# Altium PCB Control_Board.PcbDoc (part 1 of 2)
Units mm, origin at the board's own origin, x right, y up, seen from the top; angles counter-clockwise.
Board outline 340 x 220 mm, 2 copper layers (Top Layer, Bottom Layer); 101 components, 44 nets, 469 pads, 64 vias.
Unrouted connection lines stored in the file: 274.
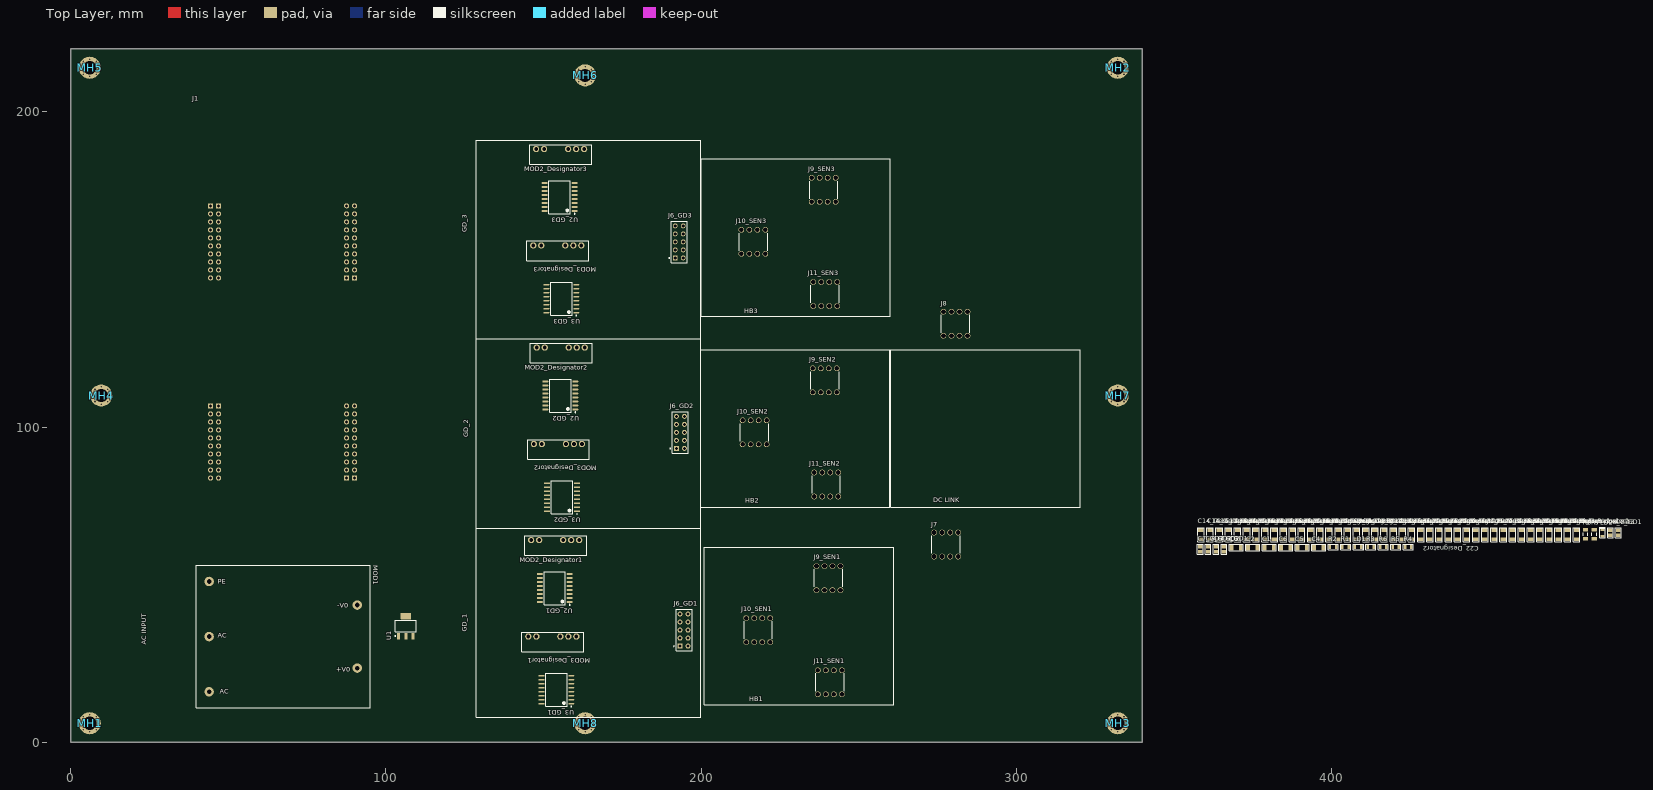
[diagram p0: Top Layer view]
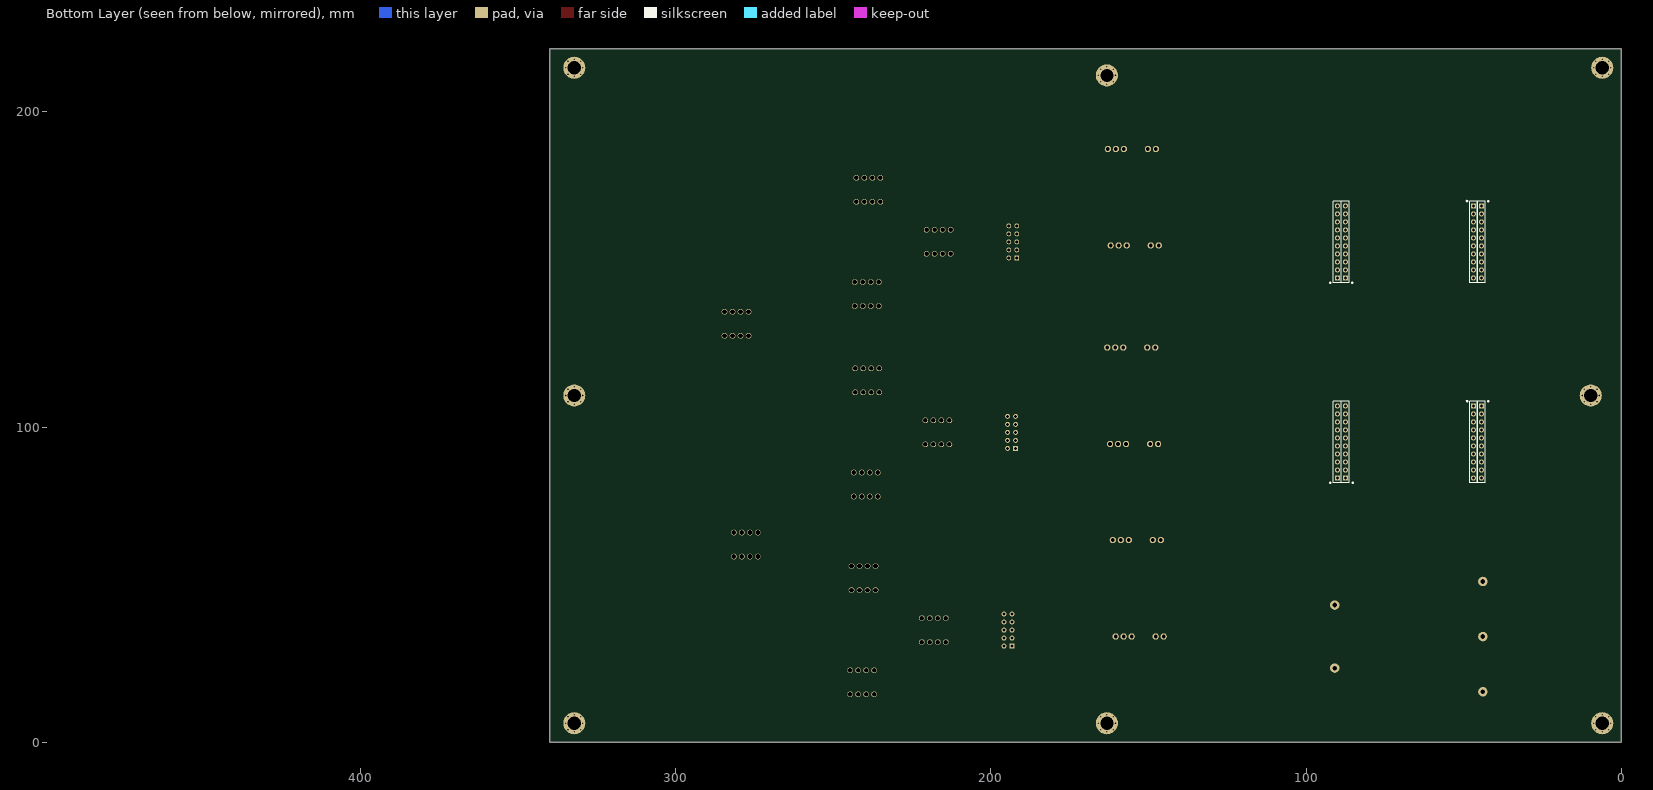
[diagram p1: Bottom Layer view, seen from below]

## Layer stack, top to bottom
Top Solder: solder mask 0.0102, Solder Resist, Dk 3.5
Top Layer: signal copper 0.0356
Dielectric 1: dielectric 0.32, FR-4, Dk 4.8
Bottom Layer: signal copper 0.0356
Bottom Solder: solder mask 0.0102, Solder Resist, Dk 3.5

## Board outline
0,0 0,220 340,220 340,0

## Design rules (kind name [scope] priority, off if disabled: settings)
Clearance [All] p1: gap=0.254 ignorepadtopadclearanceinfootprint=FALSE
PolygonConnect [All] p1: connectstyle=Relief reliefconductorwidth=0.254 reliefentries=4 polygonreliefangle="90 Angle" airgapwidth=0.254
RoutingVias [All] p1: holewidth=0.711 width=1.27 viastyle="Through Hole" minholewidth=0.711 minwidth=1.27 maxholewidth=0.711 maxwidth=1.27
SolderMaskExpansion [All] p1: expansion=0.102 istentingtop=FALSE
SupplyNets "Schematic Supply Nets_4" [InNet('HV_GND_SEN1')] p1: voltage=0.000
SupplyNets "Schematic Supply Nets_3" [InNet('HV_PWR_SEN1')] p2: voltage=0.000
SupplyNets "Schematic Supply Nets_6" [InNet('VEE_LS_GD_HB_GD1')] p3: voltage=0.000
SupplyNets "Schematic Supply Nets_2" [InNet('+5V')] p4: voltage=0.000
SupplyNets "Schematic Supply Nets_1" [InNet('+3V3')] p5: voltage=0.000
SupplyNets "Schematic Supply Nets" [InNet('GND')] p6: voltage=0.000
Width [All] p1: maxlimit=0.254 minlimit=0.254 preferedwidth=0.254
30 further rules are at their usual default settings.

## Classes and differential pairs
channel class HB_SENSING: SEN1 SEN2 SEN3
component class SEN3: J9_SEN3 J10_SEN3 J11_SEN3
component class SEN2: J9_SEN2 J10_SEN2 J11_SEN2
component class SEN1: J9_SEN1 J10_SEN1 J11_SEN1
component class Control_Board_SCH: J7 J8
channel class Gate_Driver_Supply: Designator1 Designator2 Designator3
channel class Gate_Driver: GD1 GD2 GD3
net class GD_LS_TEMP[1..3]: GD_LS_TEMP1 GD_LS_TEMP2 GD_LS_TEMP3
net class GD_LS_PWM[1..3]: GD_LS_PWM1 GD_LS_PWM2 GD_LS_PWM3
net class GD_HS_TEMP[1..3]: GD_HS_TEMP1 GD_HS_TEMP2 GD_HS_TEMP3
net class GD_HS_PWM[1..3]: GD_HS_PWM1 GD_HS_PWM2 GD_HS_PWM3
net class GD_EN[1..3]: GD_EN1 GD_EN2 GD_EN3
net class GD_\F\L\T\[1..3]: GD_\F\L\T\1 GD_\F\L\T\2 GD_\F\L\T\3
component class GD3: C7_GD3 C8_GD3 J6_GD3 U2_GD3 U3_GD3
component class GD2: C7_GD2 C8_GD2 J6_GD2 U2_GD2 U3_GD2
component class GD1: C7_GD1 C8_GD1 J6_GD1 U2_GD1 U3_GD1
component class Designator: J1 R1 R2 R3 R4 R5 R6
component class Designator3: C9_Designator3 C10_Designator3 C11_Designator3 C12_Designator3 C13_Designator3 C14_Designator3 C15_Designator3 C16_Designator3 C17_Designator3 C18_Designator3 C19_Designator3 C20_Designator3 C21_Designator3 C22_Designator3 MOD2_Designator3 MOD3_Designator3
component class Designator2: C9_Designator2 C10_Designator2 C11_Designator2 C12_Designator2 C13_Designator2 C14_Designator2 C15_Designator2 C16_Designator2 C17_Designator2 C18_Designator2 C19_Designator2 C20_Designator2 C21_Designator2 C22_Designator2 MOD2_Designator2 MOD3_Designator2
component class Designator1: C9_Designator1 C10_Designator1 C11_Designator1 C12_Designator1 C13_Designator1 C14_Designator1 C15_Designator1 C16_Designator1 C17_Designator1 C18_Designator1 C19_Designator1 C20_Designator1 C21_Designator1 C22_Designator1 MOD2_Designator1 MOD3_Designator1

## Components (designator, comment, footprint, x,y, rotation, side; value= is the part's Value field where it differs from the comment)
C1 "10uF 10% 50V X7R 1206" CAPC3216X18N 380.251,61.766 r0 top value=10µF
C2 "10uF 10% 50V X7R 1206" CAPC3216X18N 375.018,61.766 r0 top value=10µF
C3 "10uF 10% 50V X7R 1206" CAPC3216X18N 369.785,61.766 r0 top value=10µF
C4 "10uF 10% 50V X7R 1206" CAPC3216X18N 395.95,61.766 r0 top value=10µF
C5 "10uF 10% 50V X7R 1206" CAPC3216X18N 390.717,61.766 r0 top value=10µF
C6 "10uF 10% 50V X7R 1206" CAPC3216X18N 385.484,61.766 r0 top value=10µF
C7_GD1 "1uF 10% 50V X7R 0805" CAPC2012X10N 491.046,66.449 r90 top value=1µF (schematic designator C7)
C7_GD2 "1uF 10% 50V X7R 0805" CAPC2012X10N 360.886,61.216 r90 top value=1µF (schematic designator C7)
C7_GD3 "1uF 10% 50V X7R 0805" CAPC2012X10N 358.378,61.216 r90 top value=1µF (schematic designator C7)
C8_GD1 "1uF 10% 50V X7R 0805" CAPC2012X10N 365.902,61.216 r90 top value=1µF (schematic designator C8)
C8_GD2 "1uF 10% 50V X7R 0805" CAPC2012X10N 363.394,61.216 r90 top value=1µF (schematic designator C8)
C8_GD3 "1uF 10% 50V X7R 0805" CAPC2012X10N 488.538,66.449 r90 top value=1µF (schematic designator C8)
C9_Designator1 "1uF 10% 50V X7R 1206" CAPC3216X18N 405.106,65.849 r90 top value=1µF (schematic designator C9)
C9_Designator2 "1uF 10% 50V X7R 1206" CAPC3216X18N 408.014,65.849 r90 top value=1µF (schematic designator C9)
C9_Designator3 "1uF 10% 50V X7R 1206" CAPC3216X18N 410.922,65.849 r90 top value=1µF (schematic designator C9)
C10_Designator1 "10uF 10% 50V X7R 1206" CAPC3216X18N 396.382,65.849 r90 top value=10µF (schematic designator C10)
C10_Designator2 "10uF 10% 50V X7R 1206" CAPC3216X18N 399.29,65.849 r90 top value=10µF (schematic designator C10)
C10_Designator3 "10uF 10% 50V X7R 1206" CAPC3216X18N 402.198,65.849 r90 top value=10µF (schematic designator C10)
C11_Designator1 "10uF 10% 100V X6S 1206" CAPC3216X18N 413.83,65.849 r90 top value=10µF (schematic designator C11)
C11_Designator2 "10uF 10% 100V X6S 1206" CAPC3216X18N 425.462,65.849 r90 top value=10µF (schematic designator C11)
C11_Designator3 "10uF 10% 100V X6S 1206" CAPC3216X18N 428.37,65.849 r90 top value=10µF (schematic designator C11)
C12_Designator1 "1uF 10% 50V X7R 1206" CAPC3216X18N 431.278,65.849 r90 top value=1µF (schematic designator C12)
C12_Designator2 "1uF 10% 50V X7R 1206" CAPC3216X18N 416.738,65.849 r90 top value=1µF (schematic designator C12)
C12_Designator3 "1uF 10% 50V X7R 1206" CAPC3216X18N 419.646,65.849 r90 top value=1µF (schematic designator C12)
C13_Designator1 "1uF 10% 50V X7R 1206" CAPC3216X18N 422.554,65.849 r90 top value=1µF (schematic designator C13)
C13_Designator2 "1uF 10% 50V X7R 1206" CAPC3216X18N 367.302,65.849 r90 top value=1µF (schematic designator C13)
C13_Designator3 "1uF 10% 50V X7R 1206" CAPC3216X18N 370.21,65.849 r90 top value=1µF (schematic designator C13)
C14_Designator1 "1uF 10% 50V X7R 1206" CAPC3216X18N 373.118,65.849 r90 top value=1µF (schematic designator C14)
C14_Designator2 "1uF 10% 50V X7R 1206" CAPC3216X18N 358.578,65.849 r90 top value=1µF (schematic designator C14)
C14_Designator3 "1uF 10% 50V X7R 1206" CAPC3216X18N 361.486,65.849 r90 top value=1µF (schematic designator C14)
C15_Designator1 "10uF 10% 50V X7R 1206" CAPC3216X18N 364.394,65.849 r90 top value=10µF (schematic designator C15)
C15_Designator2 "10uF 10% 50V X7R 1206" CAPC3216X18N 376.026,65.849 r90 top value=10µF (schematic designator C15)
C15_Designator3 "10uF 10% 50V X7R 1206" CAPC3216X18N 387.658,65.849 r90 top value=10µF (schematic designator C15)
C16_Designator1 "1uF 10% 50V X7R 1206" CAPC3216X18N 390.566,65.849 r90 top value=1µF (schematic designator C16)
C16_Designator2 "1uF 10% 50V X7R 1206" CAPC3216X18N 393.474,65.849 r90 top value=1µF (schematic designator C16)
C16_Designator3 "1uF 10% 50V X7R 1206" CAPC3216X18N 378.934,65.849 r90 top value=1µF (schematic designator C16)
C17_Designator1 "10uF 10% 50V X7R 1206" CAPC3216X18N 381.842,65.849 r90 top value=10µF (schematic designator C17)
C17_Designator2 "10uF 10% 50V X7R 1206" CAPC3216X18N 384.75,65.849 r90 top value=10µF (schematic designator C17)
C17_Designator3 "10uF 10% 50V X7R 1206" CAPC3216X18N 463.266,65.849 r90 top value=10µF (schematic designator C17)
C18_Designator1 "10uF 10% 100V X6S 1206" CAPC3216X18N 466.174,65.849 r90 top value=10µF (schematic designator C18)
C18_Designator2 "10uF 10% 100V X6S 1206" CAPC3216X18N 457.45,65.849 r90 top value=10µF (schematic designator C18)
C18_Designator3 "10uF 10% 100V X6S 1206" CAPC3216X18N 460.358,65.849 r90 top value=10µF (schematic designator C18)
C19_Designator1 "1uF 10% 50V X7R 1206" CAPC3216X18N 474.898,65.849 r90 top value=1µF (schematic designator C19)
C19_Designator2 "1uF 10% 50V X7R 1206" CAPC3216X18N 477.806,65.849 r90 top value=1µF (schematic designator C19)
C19_Designator3 "1uF 10% 50V X7R 1206" CAPC3216X18N 469.082,65.849 r90 top value=1µF (schematic designator C19)
C20_Designator1 "1uF 10% 50V X7R 1206" CAPC3216X18N 471.99,65.849 r90 top value=1µF (schematic designator C20)
C20_Designator2 "1uF 10% 50V X7R 1206" CAPC3216X18N 440.002,65.849 r90 top value=1µF (schematic designator C20)
C20_Designator3 "1uF 10% 50V X7R 1206" CAPC3216X18N 442.91,65.849 r90 top value=1µF (schematic designator C20)
C21_Designator1 "1uF 10% 50V X7R 1206" CAPC3216X18N 434.186,65.849 r90 top value=1µF (schematic designator C21)
C21_Designator2 "1uF 10% 50V X7R 1206" CAPC3216X18N 437.094,65.849 r90 top value=1µF (schematic designator C21)
C21_Designator3 "1uF 10% 50V X7R 1206" CAPC3216X18N 451.634,65.849 r90 top value=1µF (schematic designator C21)
C22_Designator1 "10uF 10% 50V X7R 1206" CAPC3216X18N 454.542,65.849 r90 top value=10µF (schematic designator C22)
C22_Designator2 "10uF 10% 50V X7R 1206" CAPC3216X18N 445.818,65.824 r270 top value=10µF (schematic designator C22)
C22_Designator3 "10uF 10% 50V X7R 1206" CAPC3216X18N 448.726,65.849 r90 top value=10µF (schematic designator C22)
J1 "CON80: LAUNCHXL-F28379D" LAUNCHXL-F28379D 44.323,170.18 r0 top
J6_GD1 "CON10: PPTC052LFBN-RC" SLIN-PPTC052LFBN-RC_V 194.564,35.56 r90 top (schematic designator J6)
J6_GD2 "CON10: PPTC052LFBN-RC" SLIN-PPTC052LFBN-RC_V 193.421,98.298 r90 top (schematic designator J6)
J6_GD3 "CON10: PPTC052LFBN-RC" SLIN-PPTC052LFBN-RC_V 193.04,158.75 r90 top (schematic designator J6)
J7 "CON1: 7460307" "7460307_chemical surface" 277.723,62.707 r0 top
J8 "CON1: 7460307" "7460307_chemical surface" 280.695,132.781 r0 top
J9_SEN1 "CON1: 7460307" "7460307_chemical surface" 240.411,52.07 r0 top (schematic designator J9)
J9_SEN2 "CON1: 7460307" "7460307_chemical surface" 239.268,114.808 r0 top (schematic designator J9)
J9_SEN3 "CON1: 7460307" "7460307_chemical surface" 238.887,175.26 r0 top (schematic designator J9)
J10_SEN1 "CON1: 7460307" "7460307_chemical surface" 218.105,35.56 r0 top (schematic designator J10)
J10_SEN2 "CON1: 7460307" "7460307_chemical surface" 216.962,98.298 r0 top (schematic designator J10)
J10_SEN3 "CON1: 7460307" "7460307_chemical surface" 216.581,158.75 r0 top (schematic designator J10)
J11_SEN1 "CON1: 7460307" "7460307_chemical surface" 240.865,19.012 r0 top (schematic designator J11)
J11_SEN2 "CON1: 7460307" "7460307_chemical surface" 239.722,81.75 r0 top (schematic designator J11)
J11_SEN3 "CON1: 7460307" "7460307_chemical surface" 239.341,142.202 r0 top (schematic designator J11)
LD1 "RED 2mA 0803" LED_HSMH-H150 408.449,61.966 r0 top
LD2 "RED 2mA 0803" LED_HSMH-H150 486.03,66.371 r90 top
MH1 "Mounting_Hole_M4" Mounting_Hole_M4 6,6 r0 top
MH2 "Mounting_Hole_M4" Mounting_Hole_M4 332.189,214 r0 top
MH3 "Mounting_Hole_M4" Mounting_Hole_M4 332.189,6 r0 top
MH4 "Mounting_Hole_M4" Mounting_Hole_M4 9.652,110 r0 top
MH5 "Mounting_Hole_M4" Mounting_Hole_M4 6,214 r0 top
MH6 "Mounting_Hole_M4" Mounting_Hole_M4 163.189,211.582 r0 top
MH7 "Mounting_Hole_M4" Mounting_Hole_M4 332.189,110 r0 top
MH8 "Mounting_Hole_M4" Mounting_Hole_M4 163.189,6 r0 top
MOD1 "MOD: TMS10105" "MOD: TMS10105-Footprint-1" 43.885,50.998 r0 top
MOD2_Designator1 "MOD: NMV0515SC" "MOD: NMV0515SC" 146.05,64.135 r0 top (schematic designator MOD2)
MOD2_Designator2 "MOD: NMV0515SC" "MOD: NMV0515SC" 147.828,125.222 r0 top (schematic designator MOD2)
MOD2_Designator3 "MOD: NMV0515SC" "MOD: NMV0515SC" 147.625,188.214 r0 top (schematic designator MOD2)
MOD3_Designator1 "MOD: NMV0515SC" "MOD: NMV0515SC" 145.161,33.528 r0 top (schematic designator MOD3)
MOD3_Designator2 "MOD: NMV0515SC" "MOD: NMV0515SC" 146.939,94.615 r0 top (schematic designator MOD3)
MOD3_Designator3 "MOD: NMV0515SC" "MOD: NMV0515SC" 146.736,157.607 r0 top (schematic designator MOD3)
R1 "10K 1% 1/4W 0805" RESC2012X05N 404.491,61.966 r0 top value=10k
R2 "10K 1% 1/4W 0805" RESC2012X05N 400.533,61.966 r0 top value=10k
R3 "10K 1% 1/4W 0805" RESC2012X05N 412.51,61.966 r0 top value=10k
R4 "100R 1% 1/8W 0805" RESC2012X05N 424.384,61.966 r0 top value=100
R5 "100R 1% 1/8W 0805" RESC2012X05N 420.426,61.966 r0 top value=100
R6 "100R 1% 1/8W 0805" RESC2012X05N 416.468,61.966 r0 top value=100
R7 "10K 1% 1/4W 1206" RESC3116X06N 483.397,65.974 r90 top value=10k
R8 "10K 1% 1/4W 1206" RESC3116X06N 480.639,65.974 r90 top value=10k
U1 "IC: LM1117MP-3.3/NOPB" DCY0004A_M 106.299,36.83 r90 top
U2_GD1 "IC: UCC21710QDWRQ1" SOIC127P1030X265-16N 153.543,48.895 r180 top (schematic designator U2)
U2_GD2 "IC: UCC21710QDWRQ1" SOIC127P1030X265-16N 155.321,109.982 r180 top (schematic designator U2)
U2_GD3 "IC: UCC21710QDWRQ1" SOIC127P1030X265-16N 155.118,172.974 r180 top (schematic designator U2)
U3_GD1 "IC: UCC21710QDWRQ1" SOIC127P1030X265-16N 154.051,16.637 r180 top (schematic designator U3)
U3_GD2 "IC: UCC21710QDWRQ1" SOIC127P1030X265-16N 155.829,77.724 r180 top (schematic designator U3)
U3_GD3 "IC: UCC21710QDWRQ1" SOIC127P1030X265-16N 155.626,140.716 r180 top (schematic designator U3)

## Footprints (in the part's own frame and the unit in brackets; to place one, negate y for a bottom-side part, rotate by r counter-clockwise, add the part's x,y. Pads: shape width x height; smd on the part's side, far side on the other; paste and mask are expansions set on the pad)
"7460307_chemical surface" [mm] "WP-BUTR Bushes with two Rows Pin-Plate, M4, blind thr 6mm"
  round 1.8 hole 1.475: 1(-3.81,-3.81) 1(-3.81,3.81) 1(-1.27,-3.81) 1(-1.27,3.81) 1(1.27,-3.81) 1(1.27,3.81) 1(3.81,-3.81) 1(3.81,3.81)
  silkscreen extent -4.5,-2.8 4.5,2.8, body extent -4.5,-4.5 4.5,4.5, height 7
CAPC2012X10N [mm]
  rect 1.135x1.42 smd: 1(-0.857,0) 2(0.857,0)
  silkscreen extent -1.6,-0.89 1.6,0.9, body extent -1.05,-0.65 1.05,0.65, height 0.95
CAPC3216X18N [mm]
  rect 1.15x1.75 smd: 1(-1.475,0) 2(1.475,0)
  silkscreen extent -2.22,-1.05 2.24,1.05, body extent -1.65,-0.85 1.65,0.85, height 1.8
DCY0004A_M [mm] "SOT223, 4-Leads, Body 6.7x3.7mm, Pitch 2.3mm, IPC Low Density"
  rrect10% 2.05x1 smd: 1(-3.175,2.3) 2(-3.175,0) 3(-3.175,-2.3)
  rrect5% 2.05x3.25 smd: 4(3.175,0)
  silkscreen extent -3.3,-3.35 1.85,3.47, body extent -3.5,-3.25 3.5,3.25, height 1.62
LAUNCHXL-F28379D [mm]
  rect 1.62x1.62 hole 1.02 mask+0.1: 1(0,0) 11(45.72,-22.86) 21(2.54,0) 31(43.18,-22.86) 41(0,-63.5) 51(45.72,-86.36) 61(2.54,-63.5) 71(43.18,-86.36)
  round 1.62 hole 1.02 mask+0.1: 2(0,-2.54) 3(0,-5.08) 4(0,-7.62) 5(0,-10.16) 6(0,-12.7) 7(0,-15.24) 8(0,-17.78) 9(0,-20.32) 10(0,-22.86) 12(45.72,-20.32) 13(45.72,-17.78) 14(45.72,-15.24) 15(45.72,-12.7) 16(45.72,-10.16) 17(45.72,-7.62) 18(45.72,-5.08) 19(45.72,-2.54) 20(45.72,0) 22(2.54,-2.54) 23(2.54,-5.08) 24(2.54,-7.62) 25(2.54,-10.16) 26(2.54,-12.7) 27(2.54,-15.24) 28(2.54,-17.78) 29(2.54,-20.32) 30(2.54,-22.86) 32(43.18,-20.32) 33(43.18,-17.78) 34(43.18,-15.24) 35(43.18,-12.7) 36(43.18,-10.16) 37(43.18,-7.62) 38(43.18,-5.08) 39(43.18,-2.54) 40(43.18,0) 42(0,-66.04) 43(0,-68.58) 44(0,-71.12) 45(0,-73.66) 46(0,-76.2) 47(0,-78.74) 48(0,-81.28) 49(0,-83.82) 50(0,-86.36) 52(45.72,-83.82) 53(45.72,-81.28) 54(45.72,-78.74) 55(45.72,-76.2) 56(45.72,-73.66) 57(45.72,-71.12) 58(45.72,-68.58) 59(45.72,-66.04) 60(45.72,-63.5) 62(2.54,-66.04) 63(2.54,-68.58) 64(2.54,-71.12) 65(2.54,-73.66) 66(2.54,-76.2) 67(2.54,-78.74) 68(2.54,-81.28) 69(2.54,-83.82) 70(2.54,-86.36) 72(43.18,-83.82) 73(43.18,-81.28) 74(43.18,-78.74) 75(43.18,-76.2) 76(43.18,-73.66) 77(43.18,-71.12) 78(43.18,-68.58) 79(43.18,-66.04) 80(43.18,-63.5)
  body extent -6.1,-98.19 52.32,32.66, height 16.62
LED_HSMH-H150 [mm]
  rect 0.8x1.35 smd: 1(-1,0) 2(1,0)
  silkscreen extent -1.58,-0.85 1.78,0.85, body extent -1.08,-0.6 0.92,0.65, height 1.11
"MOD: NMV0515SC" [mm]
  round 2 hole 1.15: 1(0,0) 2(2.54,0) 5(10.16,0) 6(12.7,0) 7(15.24,0)
  silkscreen extent -2.01,-4.78 17.63,1.42, body extent -1.91,-4.83 17.59,1.19, height 10.01
"MOD: TMS10105-Footprint-1" [mm]
  round 3 hole 1.5: 1(47,-7.5) 3(47,-27.5) 4(0,-35) 5(0,-17.5) 6(0,0)
  silkscreen extent -4.06,-40.13 51.18,5.21, body extent -3.95,-40.03 51.05,4.97, height 24.01
Mounting_Hole_M4 [mm]
  round 7 hole 4.2: 1(0,0)
RESC2012X05N [mm]
  rect 0.8x1.35 smd: 1(-1,0) 2(1,0)
  silkscreen extent -1.58,-0.85 1.58,0.85, body extent -1.05,-0.67 1.05,0.67, height 0.5
RESC3116X06N [mm]
  rect 1.1x1.7 smd: 1(-1.4,0) 2(1.4,0)
  silkscreen extent -0.45,-0.75 0.45,0.75, body extent -1.6,-0.85 1.6,0.85, height 0.65
SLIN-PPTC052LFBN-RC_V [mm] "THD, 10-Leads, Body 13.2x5.08mm, Pitch 2.54mm"
  rect 1.55x1.55 hole 1.02: 1(-5.08,1.27)
  round 1.55 hole 1.02: 2(-2.54,1.27) 3(0,1.27) 4(2.54,1.27) 5(5.08,1.27) 6(-5.08,-1.27) 7(-2.54,-1.27) 8(0,-1.27) 9(2.54,-1.27) 10(5.08,-1.27)
  silkscreen extent -6.6,-2.54 6.6,3.32, body extent -6.6,-2.54 6.6,2.54, height 8.5
SOIC127P1030X265-16N [mm] "SOIC, 16-Leads, Body 10,30x7,50mm, Pitch 1,27mm, IPC Medium Density"
  oval 1.9x0.6 smd: 1(-4.75,4.445) 2(-4.75,3.175) 3(-4.75,1.905) 4(-4.75,0.635) 5(-4.75,-0.635) 6(-4.75,-1.905) 7(-4.75,-3.175) 8(-4.75,-4.445) 9(4.75,-4.445) 10(4.75,-3.175) 11(4.75,-1.905) 12(4.75,-0.635) 13(4.75,0.635) 14(4.75,1.905) 15(4.75,3.175) 16(4.75,4.445)
  silkscreen extent -4.88,-5.25 3.4,5.42, body extent -5.17,-5.15 5.17,5.15, height 2.59

## Part data
C1 C2 C3 C4 C5 C6 C10_Designator1 C10_Designator2 C10_Designator3 C15_Designator1 C15_Designator2 C15_Designator3 C17_Designator1 C17_Designator2 C17_Designator3 C22_Designator1 C22_Designator2 C22_Designator3: library part CMP-001-00049-1, "Ceramic Capacitor, Multilayer, Ceramic, 50V, 10% +Tol, 10% -Tol, X7R, 15% TC, 10uF, Surface Mount, 1206", Case Code (Metric)=3216, Case/Package=1206, Dielectric=X7R, Dielectric Material=Ceramic, Manufacturer=TDK, Manufacturer Lifecycle Status=PRODUCTION, Manufacturer Part Number=C3216X7R1H106K160AC, Max Operating Temperature=125°C, Min Operating Temperature=-55°C, Voltage Rating=50V, Category="Ceramic Capacitors", China RoHS=Compliant, ComponentLink1Description=https://datasheet.octopart.com:443/C3216X7R1H106K160AC-TDK-datasheet-175423548.pdf?src-supplier=TME, ComponentLink1URL=https://datasheet.octopart.com:443/C3216X7R1H106K160AC-TDK-datasheet-175423548.pdf?src-supplier=TME, ComponentLink2Description=https://datasheet.octopart.com:443/C3216X7R1H106K160AC-TDK-datasheet-182135025.pdf?src-supplier=TME, ComponentLink2URL=https://datasheet.octopart.com:443/C3216X7R1H106K160AC-TDK-datasheet-182135025.pdf?src-supplier=TME, ComponentLink3Description=https://datasheet.octopart.com:443/C3216X7R1H106K160AC-TDK-datasheet-159617022.pdf?src-supplier=TME, ComponentLink3URL=https://datasheet.octopart.com:443/C3216X7R1H106K160AC-TDK-datasheet-159617022.pdf?src-supplier=TME, ComponentLink4Description=https://datasheet.octopart.com:443/C3216X7R1H106K160AC-TDK-datasheet-151546523.pdf?src-supplier=ODG+(Origin+Data+Global), ComponentLink4URL=https://datasheet.octopart.com:443/C3216X7R1H106K160AC-TDK-datasheet-151546523.pdf?src-supplier=ODG+(Origin+Data+Global), ComponentLink5Description=https://datasheet.octopart.com/C3216X7R1H106K160AC-TDK-datasheet-41194876.pdf, ComponentLink5URL=https://datasheet.octopart.com/C3216X7R1H106K160AC-TDK-datasheet-41194876.pdf, Design Item ID="10uF 10% 50V X7R 1206", Export Control Classification Number (ECCN) Code=EAR99, Harmonized Tariff Schedule (HTS) Code=8532.24.00.20, Height=1.6mm, Introduction Date=2018-03-29, Lead Free="Lead Free", Length=3.2mm, Lifecycle Status=Production, Material=Ceramic, Max Length=3.5mm, Max Width=1.9mm, Min Length=3.1mm, Min Width=1.5mm, Mounting Technology="Surface Mount", Number of Terminals=2, Pricing="100=3,09, 250=2,81, 500=2,35, 1000=2,2, 2000=1,97 (DKK)", REACH SVHC=Yes, RoHS=Compliant, Schedule B="8532240020, 8532240020", Source=MasterLibrary_SCH.SchLib, Stock=26276, Thickness=1.6mm, Voltage Rating (DC)=50V, Width=1.6mm
C7_GD1 C7_GD2 C7_GD3 C8_GD1 C8_GD2 C8_GD3: "Ceramic Capacitor, Multilayer, Ceramic, 50V, 10% +Tol, 10% -Tol, X7R, 15% TC, 1uF, Surface Mount, 0805", Case Code (Metric)=2012, Case/Package=0805, Dielectric=X7R, Dielectric Material=Ceramic, Manufacturer=TDK, Manufacturer Lifecycle Status=PRODUCTION, Manufacturer Part Number=C2012X7R1H105K125AB, Max Operating Temperature=125°C, Min Operating Temperature=-55°C, Supplier Part Number=2346944, Voltage Rating=50V, Category="Ceramic Capacitors", China RoHS=Compliant, ComponentLink1Description=https://datasheet.octopart.com:443/C3216X7R1H106K160AC-TDK-datasheet-175423548.pdf?src-supplier=TME, ComponentLink1URL=https://datasheet.octopart.com:443/C3216X7R1H106K160AC-TDK-datasheet-175423548.pdf?src-supplier=TME, ComponentLink2Description=https://datasheet.octopart.com:443/C3216X7R1H106K160AC-TDK-datasheet-182135025.pdf?src-supplier=TME, ComponentLink2URL=https://datasheet.octopart.com:443/C3216X7R1H106K160AC-TDK-datasheet-182135025.pdf?src-supplier=TME, ComponentLink3Description=https://datasheet.octopart.com:443/C3216X7R1H106K160AC-TDK-datasheet-159617022.pdf?src-supplier=TME, ComponentLink3URL=https://datasheet.octopart.com:443/C3216X7R1H106K160AC-TDK-datasheet-159617022.pdf?src-supplier=TME, ComponentLink4Description=https://datasheet.octopart.com:443/C3216X7R1H106K160AC-TDK-datasheet-151546523.pdf?src-supplier=ODG+(Origin+Data+Global), ComponentLink4URL=https://datasheet.octopart.com:443/C3216X7R1H106K160AC-TDK-datasheet-151546523.pdf?src-supplier=ODG+(Origin+Data+Global), ComponentLink5Description=https://datasheet.octopart.com/C3216X7R1H106K160AC-TDK-datasheet-41194876.pdf, ComponentLink5URL=https://datasheet.octopart.com/C3216X7R1H106K160AC-TDK-datasheet-41194876.pdf, Export Control Classification Number (ECCN) Code=EAR99, Harmonized Tariff Schedule (HTS) Code=8532.24.00.20, Height=1.6mm, Introduction Date=2018-03-29, Lead Free="Lead Free", Length=3.2mm, Lifecycle Status=Production, Material=Ceramic, Max Length=3.5mm, Max Width=1.9mm, Min Length=3.1mm, Min Width=1.5mm, Mounting Technology="Surface Mount", Number of Terminals=2, Pricing="100=3,09, 250=2,81, 500=2,35, 1000=2,2, 2000=1,97 (DKK)", REACH SVHC=Yes, RoHS=Compliant, Stock=26276, Supplier=Farnell, Thickness=1.6mm, Voltage Rating (DC)=50V, Width=1.6mm
C9_Designator1 C9_Designator2 C9_Designator3 C12_Designator1 C12_Designator2 C12_Designator3 C13_Designator1 C13_Designator2 C13_Designator3 C14_Designator1 C14_Designator2 C14_Designator3 C16_Designator1 C16_Designator2 C16_Designator3 C19_Designator1 C19_Designator2 C19_Designator3 C20_Designator1 C20_Designator2 C20_Designator3 C21_Designator1 C21_Designator2 C21_Designator3: library part CMP-001-00048-1, "Ceramic Capacitor, Multilayer, Ceramic, 50V, 10% +Tol, 10% -Tol, X7R, 15% TC, 1uF, Surface Mount, 1206", Case Code (Metric)=3216, Case/Package=1206, Dielectric=X7R, Dielectric Material=Ceramic, Manufacturer=TDK, Manufacturer Lifecycle Status=PRODUCTION, Manufacturer Part Number=C3216X7R1H105K160AB, Max Operating Temperature=125°C, Min Operating Temperature=-55°C, Voltage Rating=50V, Category="Ceramic Capacitors", China RoHS=Compliant, ComponentLink1Description=https://datasheet.octopart.com:443/C3216X7R1H106K160AC-TDK-datasheet-175423548.pdf?src-supplier=TME, ComponentLink1URL=https://datasheet.octopart.com:443/C3216X7R1H106K160AC-TDK-datasheet-175423548.pdf?src-supplier=TME, ComponentLink2Description=https://datasheet.octopart.com:443/C3216X7R1H106K160AC-TDK-datasheet-182135025.pdf?src-supplier=TME, ComponentLink2URL=https://datasheet.octopart.com:443/C3216X7R1H106K160AC-TDK-datasheet-182135025.pdf?src-supplier=TME, ComponentLink3Description=https://datasheet.octopart.com:443/C3216X7R1H106K160AC-TDK-datasheet-159617022.pdf?src-supplier=TME, ComponentLink3URL=https://datasheet.octopart.com:443/C3216X7R1H106K160AC-TDK-datasheet-159617022.pdf?src-supplier=TME, ComponentLink4Description=https://datasheet.octopart.com:443/C3216X7R1H106K160AC-TDK-datasheet-151546523.pdf?src-supplier=ODG+(Origin+Data+Global), ComponentLink4URL=https://datasheet.octopart.com:443/C3216X7R1H106K160AC-TDK-datasheet-151546523.pdf?src-supplier=ODG+(Origin+Data+Global), ComponentLink5Description=https://datasheet.octopart.com/C3216X7R1H106K160AC-TDK-datasheet-41194876.pdf, ComponentLink5URL=https://datasheet.octopart.com/C3216X7R1H106K160AC-TDK-datasheet-41194876.pdf, Design Item ID="1uF 10% 50V X7R 1206", Export Control Classification Number (ECCN) Code=EAR99, Harmonized Tariff Schedule (HTS) Code=8532.24.00.20, Height=1.6mm, Introduction Date=2018-03-29, Lead Free="Lead Free", Length=3.2mm, Lifecycle Status=Production, Material=Ceramic, Max Length=3.5mm, Max Width=1.9mm, Min Length=3.1mm, Min Width=1.5mm, Mounting Technology="Surface Mount", Number of Terminals=2, Pricing="100=3,09, 250=2,81, 500=2,35, 1000=2,2, 2000=1,97 (DKK)", REACH SVHC=Yes, RoHS=Compliant, Source=MasterLibrary_SCH.SchLib, Stock=26276, Thickness=1.6mm, Voltage Rating (DC)=50V, Width=1.6mm
C11_Designator1 C11_Designator2 C11_Designator3 C18_Designator1 C18_Designator2 C18_Designator3: library part CMP-001-00084-1, "Multilayer Ceramic Capacitors MLCC - SMD/SMT 1206 100VDC 10uF 10% X6S", Case/Package=1206, Dielectric Material=Ceramic, Manufacturer=TDK, Manufacturer Lifecycle Status=PRODUCTION, Manufacturer Part Number=C3216X6S2A106K160AC, Max Operating Temperature=105°C, Min Operating Temperature=-55°C, Tolerance=10%, Voltage Rating=100V, Category="Ceramic Capacitors", China RoHS=Compliant, ComponentLink1Description=https://datasheet.octopart.com:443/C3216X6S2A106K160AC-TDK-datasheet-159617022.pdf?src-supplier=IHS, ComponentLink1URL=https://datasheet.octopart.com:443/C3216X6S2A106K160AC-TDK-datasheet-159617022.pdf?src-supplier=IHS, ComponentLink2Description=https://datasheet.octopart.com:443/C3216X6S2A106K160AC-TDK-datasheet-151546522.pdf?src-supplier=TDK, ComponentLink2URL=https://datasheet.octopart.com:443/C3216X6S2A106K160AC-TDK-datasheet-151546522.pdf?src-supplier=TDK, ComponentLink3Description=https://datasheet.octopart.com:443/C3216X6S2A106K160AC-TDK-datasheet-164567071.pdf?src-supplier=Future+Electronics, ComponentLink3URL=https://datasheet.octopart.com:443/C3216X6S2A106K160AC-TDK-datasheet-164567071.pdf?src-supplier=Future+Electronics, ComponentLink4Description=https://datasheet.octopart.com:443/C3216X6S2A106K160AC-TDK-datasheet-154543791.pdf?src-supplier=ODG+(Origin+Data+Global), ComponentLink4URL=https://datasheet.octopart.com:443/C3216X6S2A106K160AC-TDK-datasheet-154543791.pdf?src-supplier=ODG+(Origin+Data+Global), Design Item ID="10uF 10% 100V X6S 1206", Export Control Classification Number (ECCN) Code=EAR99, Harmonized Tariff Schedule (HTS) Code=8532.24.00.20, Height=1.6mm, Introduction Date=2021-05-19, Length=3.2mm, Lifecycle Status=Production, Material=Ceramic, Max Length=3.5mm, Max Width=1.9mm, Min Length=3.1mm, Min Width=1.5mm, Mounting Technology="Surface Mount", Number of Terminals=2, Pricing="100=5.2, 250=4.66, 500=4.09, 1000=3.87, 2000=3.66 (DKK)", REACH SVHC=Yes, RoHS=Compliant, Source=MasterLibrary_SCH.SchLib, Stock=24059, Voltage Rating (DC)=100V, Width=1.6mm
J1: "F28379D LaunchPad™ development kit for C2000™ Delfino™ MCU", Manufacturer="Texas Instruments", Manufacturer Lifecycle Status=ACTIVE, Manufacturer Part Number=LAUNCHXL-F28379D, Supplier Part Number=296-46713-ND, Category="DSPs - Digital Signal Processors", ComponentLink1Description=https://octopart.com:443/opatz8j6/c1?t=_qCjX2Wo53PZarO6BjGz1pzxvZLeCrbbVJACmNqqTvR3TEBVwYoGW-DXq5l11NPCyEyQmG2wH9P15DbxEwR5ZZHsyk33RBSXwUdEtCa7jNxIhSrryjNLEF-Vgre1piZzQz56aD2MK6QuEQpUtDRfErQs-_Fz2k06mrjKwHn2nJAT_YV2HxfigPUyr5srGnEy9lLlrNqGpcCNex5yYxUMkQXiFlqqbITrV8bFvInxDQ88sUGODQNtS64O8hVEwNdGa20kbIjdoqOBoaE1JHzrO901WwG08850-S2bXz9NSqERxo83_Q49v-k_oL6cPW0CHjrP4NMWOrNhAcehFalWX6jDFn3RYJBbH4wBv6PGCMA2lz1wT9CaKpwnDvEQJ5WJVjDawH1R7TR419iNQ7OBATXWz7I&src-supplier=Texas+Instruments, ComponentLink1URL=https://octopart.com:443/opatz8j6/c1?t=_qCjX2Wo53PZarO6BjGz1pzxvZLeCrbbVJACmNqqTvR3TEBVwYoGW-DXq5l11NPCyEyQmG2wH9P15DbxEwR5ZZHsyk33RBSXwUdEtCa7jNxIhSrryjNLEF-Vgre1piZzQz56aD2MK6QuEQpUtDRfErQs-_Fz2k06mrjKwHn2nJAT_YV2HxfigPUyr5srGnEy9lLlrNqGpcCNex5yYxUMkQXiFlqqbITrV8bFvInxDQ88sUGODQNtS64O8hVEwNdGa20kbIjdoqOBoaE1JHzrO901WwG08850-S2bXz9NSqERxo83_Q49v-k_oL6cPW0CHjrP4NMWOrNhAcehFalWX6jDFn3RYJBbH4wBv6PGCMA2lz1wT9CaKpwnDvEQJ5WJVjDawH1R7TR419iNQ7OBATXWz7I&src-supplier=Texas+Instruments, ComponentLink2Description=https://datasheet.octopart.com:443/LAUNCHXL-F28379D-Texas-Instruments-datasheet-152741484.pdf?src-supplier=ODG+(Origin+Data+Global), ComponentLink2URL=https://datasheet.octopart.com:443/LAUNCHXL-F28379D-Texas-Instruments-datasheet-152741484.pdf?src-supplier=ODG+(Origin+Data+Global), ComponentLink3Description=https://datasheet.octopart.com:443/LAUNCHXL-F28379D-Texas-Instruments-datasheet-67294821.pdf?src-supplier=element14+APAC, ComponentLink3URL=https://datasheet.octopart.com:443/LAUNCHXL-F28379D-Texas-Instruments-datasheet-67294821.pdf?src-supplier=element14+APAC, ComponentLink4Description=https://datasheet.octopart.com:443/LAUNCHXL-F28379D-Texas-Instruments-datasheet-103777603.pdf?src-supplier=TME, ComponentLink4URL=https://datasheet.octopart.com:443/LAUNCHXL-F28379D-Texas-Instruments-datasheet-103777603.pdf?src-supplier=TME, ComponentLink5Description=http://sigma.octopart.com:80/reach_statement/Texas-Instruments-company-64.pdf?src-supplier=Compliance+Statements, ComponentLink5URL=http://sigma.octopart.com:80/reach_statement/Texas-Instruments-company-64.pdf?src-supplier=Compliance+Statements, ComponentLink6Description=http://sigma.octopart.com:80/conflict_mineral_statement/Texas-Instruments-company-63.pdf?src-supplier=Compliance+Statements, ComponentLink6URL=http://sigma.octopart.com:80/conflict_mineral_statement/Texas-Instruments-company-63.pdf?src-supplier=Compliance+Statements, ComponentLink7Description=https://octopart.com:443/opatz8j6/c1?t=vmM5mUkauSidLfiIfngj-A2eh6SjcyeYQ_18RxJ-XgRT5PFLOln341s3Da68ti8m6yMC8JyHE5YCQ8oxmljwW8O_iXgryuhhxmjCmpHtdr4VDwYtt48MgbKj-slNB3Nj0mMH04CuEmFmw_fUmAswlWbCu5ZMAg5-39dPO4IMZ0IkEkvJqqV3lhWtLIq7mSnDMHN61-x5vEZotwGXpDkhXVPdiQUwVwsuDPl99fprXnUSUtNA7saaZFRkXjg1cuiRBuIcQzdWjl70NXHJ-qE7RXDui7Y0LCAu6IeHkA&src-supplier=Compliance+Statements, ComponentLink7URL=https://octopart.com:443/opatz8j6/c1?t=vmM5mUkauSidLfiIfngj-A2eh6SjcyeYQ_18RxJ-XgRT5PFLOln341s3Da68ti8m6yMC8JyHE5YCQ8oxmljwW8O_iXgryuhhxmjCmpHtdr4VDwYtt48MgbKj-slNB3Nj0mMH04CuEmFmw_fUmAswlWbCu5ZMAg5-39dPO4IMZ0IkEkvJqqV3lhWtLIq7mSnDMHN61-x5vEZotwGXpDkhXVPdiQUwVwsuDPl99fprXnUSUtNA7saaZFRkXjg1cuiRBuIcQzdWjl70NXHJ-qE7RXDui7Y0LCAu6IeHkA&src-supplier=Compliance+Statements, Core Architecture=C2000, Lifecycle Status=Production, Number of Bits=32, Pins=0, Pricing="1=46.8 (USD)", Quantity=4, REACH SVHC=No, Supplier=DigiKey
J6_GD1 J6_GD2 J6_GD3: library part CMP-002-00579-1, "Female, 10C, Straight, .100\"CC; 3.20mm Tail, No Mt. 100u\" Tin; PBT, Phos Bronze, 105 C", Color=Black, Current Rating=3A, Dielectric Material=Polyester, Manufacturer=Sullins, Manufacturer Part Number=PPTC052LFBN-RC, Max Operating Temperature=105°C, Min Operating Temperature=-40°C, Category="Card Edge Connectors", Connector Type="Header, Socket", Contact Gender=Female, Contact Material=Bronze, Contact Plating=Tin, Height=8.5mm, Housing Material=Plastic, Lead Free="Lead Free", Length=13.2mm, Lifecycle Status=Production, Mount="Through Hole", Number of Pins=10, Number of Positions=10, Number of Rows=2, Packaging=Bulk, Pitch=2.54mm, REACH SVHC=Yes, RoHS=Compliant, Row Spacing=2.54mm, Terminal Pitch=2.54mm
J7 J8 J9_SEN1 J9_SEN2 J9_SEN3 J10_SEN1 J10_SEN2 J10_SEN3 J11_SEN1 J11_SEN2 J11_SEN3: library part CMP-002-00580-1, "Conn Power Tap F 1 POS Press Fit ST Thru-Hole 8 Terminal 1 Port Bulk", Current Rating=160A, Manufacturer="Wurth Elektronik", Manufacturer Part Number=7460307, Max Operating Temperature=150°C, Min Operating Temperature=-55°C, Category=Terminals, Contact Material=Tin, Contact Plating=Tin, Height=7mm, Insulation=Non-Insulated, Length=9mm, Material=Brass, Mount="Through Hole", Mounting Technology="Through Hole", Number of Contacts=1, Number of Pins=8, Number of Rows=2, Packaging=Bulk, Pins=8, RoHS=Compliant, Termination=Press-Fit, Thread Size=M4, Width=9mm
LD1 LD2: library part CMP-00246-1, "Single Color LED, Red, Diffused, 2mm", Color=Red, Forward Current=25mA, Forward Voltage=2.6V, Manufacturer=Avago, Manufacturer Part Number=HSMH-H150, Max Operating Temperature=85°C, Min Operating Temperature=-40°C, Category=LEDs, Harmonized Tariff Schedule (HTS) Code=8541.40.20.00, Height=600µm, Introduction Date=2022-12-08, Lens Style=Diffused, Lifecycle Status=Production, Luminous Intensity=7.2mcd, Mount="Surface Mount", Number of Circuits=1, Number of Terminals=2, Peak Wavelength=660nm, REACH SVHC=Yes, RoHS=Compliant, Shape=Rectangular, Terminal Pitch=2.7mm, Viewing Angle=170°
MH1 MH2 MH3 MH4 MH5 MH6 MH7 MH8: library part CMP-293-000000-1, "Mounting Hole M4", Component Type=Mechanical, Design Item ID=Mounting_Hole_M4, Pin Count=1, Source=Electromechanical.SchLib
MOD1: library part CMP-019-00012-2, "AC-DC Regulated Power Supply Module, 1 Output, 10W, 5V Output Hybrid", Current - Output 1=2A, Manufacturer="Traco Power", Manufacturer Part Number=TMS10105, Max Input Voltage=264V, Max Operating Temperature=60°C, Max Output Power=10W, Max Output Voltage=5.1V, Min Input Voltage=85V, Min Operating Temperature=-25°C, Min Output Voltage=4.9V, Nominal Input Voltage=115V, Nominal Output Voltage=5V, Approvals="CB, CE, EN, IEC, UL, cUL", Category="Power Supply Modules", Depth=45mm, Efficiency=78%, Height - Seated (Max)=24.5mm, Length=55mm, Lifecycle Status=Obsolete, Max Output Current=2A, Number of Circuits=1, Number of Outputs=1, Number of Pins=6, Number of Terminals=6, Output Current=2A, Output Power=10W, Output Voltage=5V
MOD2_Designator1 MOD2_Designator2 MOD2_Designator3 MOD3_Designator1 MOD3_Designator2 MOD3_Designator3: library part CMP-00247-2, "Module DC-DC 5VIN 2-OUT 15V/-15V 0.033A/-0.033A 1W 5-Pin SIP Tube", Case/Package=SIP, Current - Output 1=33mA, Current - Output 2=-33mA, Flammability Rating="UL94 V-0", Isolation Voltage=3kV, Manufacturer="Murata Power Solutions", Manufacturer Part Number=NMV0515SC, Max Operating Temperature=85°C, Max Output Power=1W, Max Supply Voltage=5.5V, Min Input Voltage (DC)=4.5V, Min Operating Temperature=-40°C, Nominal Output Voltage=15V, Nominal Supply Voltage=5V, Voltage - Output 2=-15V, Category="Board Mount Modules", China RoHS=Non-Compliant, ComponentLink1Description=https://datasheet.octopart.com:443/NMV0515SC-Murata-Power-Solutions-datasheet-180811994.pdf?src-supplier=IHS, ComponentLink1URL=https://datasheet.octopart.com:443/NMV0515SC-Murata-Power-Solutions-datasheet-180811994.pdf?src-supplier=IHS, ComponentLink2Description=https://datasheet.octopart.com:443/NMV0515SC-Murata-Power-Solutions-datasheet-10084750.pdf?src-supplier=element14+APAC, ComponentLink2URL=https://datasheet.octopart.com:443/NMV0515SC-Murata-Power-Solutions-datasheet-10084750.pdf?src-supplier=element14+APAC, ComponentLink3Description=https://datasheet.octopart.com:443/NMV0515SC-Murata-Power-Solutions-datasheet-6396052.pdf?src-supplier=element14+APAC, ComponentLink3URL=https://datasheet.octopart.com:443/NMV0515SC-Murata-Power-Solutions-datasheet-6396052.pdf?src-supplier=element14+APAC, ComponentLink4Description=https://datasheet.octopart.com:443/NMV0515SC-Murata-Power-Solutions-datasheet-68536991.pdf?src-supplier=element14+APAC, ComponentLink4URL=https://datasheet.octopart.com:443/NMV0515SC-Murata-Power-Solutions-datasheet-68536991.pdf?src-supplier=element14+APAC, ComponentLink5Description=https://datasheet.octopart.com:443/NMV0515SC-Murata-Power-Solutions-datasheet-12521135.pdf?src-supplier=Newark, ComponentLink5URL=https://datasheet.octopart.com:443/NMV0515SC-Murata-Power-Solutions-datasheet-12521135.pdf?src-supplier=Newark, ComponentLink6Description=https://datasheet.octopart.com:443/NMV0515SC-Murata-Power-Solutions-datasheet-81845694.pdf?src-supplier=Newark, ComponentLink6URL=https://datasheet.octopart.com:443/NMV0515SC-Murata-Power-Solutions-datasheet-81845694.pdf?src-supplier=Newark, ComponentLink7Description=https://datasheet.octopart.com:443/NMV0515SC-Murata-datasheet-142546881.pdf?src-supplier=Ciiva, ComponentLink7URL=https://datasheet.octopart.com:443/NMV0515SC-Murata-datasheet-142546881.pdf?src-supplier=Ciiva, ComponentLink8Description=https://datasheet.octopart.com:443/NMV0515SC-Murata-datasheet-141294565.pdf?src-supplier=Ciiva, ComponentLink8URL=https://datasheet.octopart.com:443/NMV0515SC-Murata-datasheet-141294565.pdf?src-supplier=Ciiva, ComponentLink9Description=https://datasheet.octopart.com:443/NMV0515SC-Murata-datasheet-1208.pdf?src-supplier=Farnell, ComponentLink9URL=https://datasheet.octopart.com:443/NMV0515SC-Murata-datasheet-1208.pdf?src-supplier=Farnell, ComponentLink10Description=http://sigma.octopart.com:80/reach_statement/Murata-company-16.pdf?src-supplier=Compliance+Statements, ComponentLink10URL=http://sigma.octopart.com:80/reach_statement/Murata-company-16.pdf?src-supplier=Compliance+Statements, ComponentLink11Description=https://datasheet.ciiva.com/15134/getdatasheetpartid-67812-15134142.pdf?src-supplier=Verical, ComponentLink12Description=https://datasheet.ciiva.com/16493/tclt1000-16493446.pdf?src-supplier=Future+Electronics, ComponentLink13Description=https://datasheet.ciiva.com/16618/adum5240-5241-5242-16618062.pdf?src-supplier=Avnet+Europe, ComponentLink14Description=https://datasheet.ciiva.com/2081/adum5240-5241-5242-2081908.pdf?src-supplier=Digi-Key, ComponentLink15Description=https://datasheet.ciiva.com/2172/rnm-2172491.pdf?src-supplier=Digi-Key, ComponentLink16Description=https://datasheet.ciiva.com/2172/rnm-2172495.pdf?src-supplier=Digi-Key, ComponentLink17Description=https://datasheet.ciiva.com/2374/r-78hbxx-0-5-l-2374159.pdf?src-supplier=Digi-Key, ComponentLink18Description=https://datasheet.ciiva.com/26321/tclt1000-26321177.pdf?src-supplier=Element14, ComponentLink19Description=https://datasheet.ciiva.com/26911/adum5242arz-26911858.pdf?src-supplier=IIIC, ComponentLink20Description=https://datasheet.ciiva.com/29184/676157-da-01-en-dc-dc-wandler-r-78hb5-0-0-5l-29184439.pdf?src-supplier=Conrad, ComponentLink21Description=https://datasheet.ciiva.com/3148/adum5240-5241-5242-3148379.pdf?src-supplier=Avnet, ComponentLink22Description=https://datasheet.ciiva.com/4645/r-78hbxx-0-5-l-226048-4645094.pdf?src-supplier=Mouser, ComponentLink23Description=https://datasheet.ciiva.com/5783/tclt1000-5783658.pdf?src-supplier=Farnell, ComponentLink24Description=https://datasheet.ciiva.com/6573/s-110-cny17-6573733.pdf?src-supplier=Digi-Key, ComponentLink25Description=https://datasheet.ciiva.com/8040/52022-8040864.pdf?src-supplier=Element14, ComponentLink26Description=https://datasheet.ciiva.com/8091/tclt1000-8091688.pdf?src-supplier=Avnet, ComponentLink27Description=https://katalog.we-online.de/pm/datasheet/173010542.pdf?src-supplier=Digi-Key, ComponentLink28Description=https://www.recom-power.com/pdf/Powerline-DC-DC/RP240H-RW.pdf?src-supplier=Digi-Key, ComponentLink29Description=https://www.recom-power.com/pdf/Powerline-DC-DC/RPA60-FW.pdf?src-supplier=Digi-Key, ComponentLink30Description="Where buy it", Depth=6mm, Design Item ID="MOD: NMV0515SC", Efficiency=79%, Isolation=Isolated, Lead Free="Lead Free", Length=19.5mm, Lifecycle Status=Production, Max Output Current=33mA, Max Power Dissipation=1W, Min Supply Voltage=4.5V, Mounting Technology="Through Hole", Number of Circuits=1, Number of Outputs=2, Number of Terminals=5, Output Current=33mA, Output Power=1W, Output Voltage=15V, Pins=5, Power Rating=1W, Pricing="1=1797.05, 5=1743.14, 10=1689.21, 25=1635.28, 50=1581.42 (DKK)", Radiation Hardening=No, REACH SVHC=Yes, RoHS=Compliant, Schedule B="8542390000, 8542390000", Source=MasterLibrary_SCH.SchLib, Stock=15, Terminal Pitch=2.54mm, Voltage - Output 1=15V
R1 R2 R3: library part CMP-009-00659-1, "Res Thick Film 0805 10K Ohm 1% 0.125W ±100ppm/°C Molded SMD Paper T/R", Case Code (Metric)=2012, Case/Package=0805, Manufacturer="Stackpole Electronics", Manufacturer Part Number=RMCF0805FT10K0, Max Operating Temperature=155°C, Max Power Dissipation=125mW, Min Operating Temperature=-55°C, Temperature Coefficient=100ppm/°C, Tolerance=1%, Voltage Rating=150V, Category="Chip SMD Resistors", China RoHS=Non-Compliant, ComponentLink1Description=https://datasheet.octopart.com:443/RMCF0805FT10K0-Stackpole-Electronics-datasheet-182148065.pdf?src-supplier=IHS, ComponentLink1URL=https://datasheet.octopart.com:443/RMCF0805FT10K0-Stackpole-Electronics-datasheet-182148065.pdf?src-supplier=IHS, ComponentLink2Description=https://datasheet.octopart.com:443/RMCF0805FT10K0-Stackpole-Electronics-datasheet-12534581.pdf?src-supplier=Upverter, ComponentLink2URL=https://datasheet.octopart.com:443/RMCF0805FT10K0-Stackpole-Electronics-datasheet-12534581.pdf?src-supplier=Upverter, ComponentLink3Description=https://datasheet.octopart.com:443/RMCF0805FT10K0-Stackpole-Electronics-datasheet-28504820.pdf?src-supplier=Upverter, ComponentLink3URL=https://datasheet.octopart.com:443/RMCF0805FT10K0-Stackpole-Electronics-datasheet-28504820.pdf?src-supplier=Upverter, ComponentLink4Description=https://datasheet.octopart.com:443/RMCF0805FT10K0-Stackpole-Electronics-datasheet-12510902.pdf?src-supplier=Upverter, ComponentLink4URL=https://datasheet.octopart.com:443/RMCF0805FT10K0-Stackpole-Electronics-datasheet-12510902.pdf?src-supplier=Upverter, ComponentLink5Description=https://datasheet.octopart.com:443/RMCF0805FT10K0-Stackpole-Electronics-datasheet-141193804.pdf?src-supplier=Stackpole+Electronics, ComponentLink5URL=https://datasheet.octopart.com:443/RMCF0805FT10K0-Stackpole-Electronics-datasheet-141193804.pdf?src-supplier=Stackpole+Electronics, ComponentLink6Description=https://datasheet.octopart.com:443/RMCF0805FT10K0-Stackpole-Electronics-datasheet-62091608.pdf?src-supplier=Stackpole+Electronics, ComponentLink6URL=https://datasheet.octopart.com:443/RMCF0805FT10K0-Stackpole-Electronics-datasheet-62091608.pdf?src-supplier=Stackpole+Electronics, ComponentLink7Description=https://datasheet.octopart.com:443/RMCF0805FT10K0-Stackpole-Electronics-datasheet-10788263.pdf?src-supplier=Stackpole+Electronics, ComponentLink7URL=https://datasheet.octopart.com:443/RMCF0805FT10K0-Stackpole-Electronics-datasheet-10788263.pdf?src-supplier=Stackpole+Electronics, ComponentLink8Description=https://datasheet.octopart.com:443/RMCF0805FT10K0-Stackpole-Electronics-datasheet-154799224.pdf?src-supplier=Master+Electronics, ComponentLink8URL=https://datasheet.octopart.com:443/RMCF0805FT10K0-Stackpole-Electronics-datasheet-154799224.pdf?src-supplier=Master+Electronics, ComponentLink9Description=https://datasheet.octopart.com:443/RMCF0805FT10K0-Stackpole-Electronics-datasheet-11546843.pdf?src-supplier=Arrow+Electronics, ComponentLink9URL=https://datasheet.octopart.com:443/RMCF0805FT10K0-Stackpole-Electronics-datasheet-11546843.pdf?src-supplier=Arrow+Electronics, ComponentLink10Description=https://datasheet.octopart.com:443/RMCF0805FT10K0-Stackpole-Electronics-datasheet-11547379.pdf?src-supplier=Future+Electronics, ComponentLink10URL=https://datasheet.octopart.com:443/RMCF0805FT10K0-Stackpole-Electronics-datasheet-11547379.pdf?src-supplier=Future+Electronics, ComponentLink11Description=https://datasheet.octopart.com:443/RMCF0805FT10K0-Stackpole-Electronics-datasheet-8359789.pdf?src-supplier=Future+Electronics, ComponentLink11URL=https://datasheet.octopart.com:443/RMCF0805FT10K0-Stackpole-Electronics-datasheet-8359789.pdf?src-supplier=Future+Electronics, ComponentLink12Description=https://datasheet.octopart.com:443/RMCF0805FT10K0-Stackpole-Electronics-datasheet-8324226.pdf?src-supplier=Future+Electronics, ComponentLink12URL=https://datasheet.octopart.com:443/RMCF0805FT10K0-Stackpole-Electronics-datasheet-8324226.pdf?src-supplier=Future+Electronics, ComponentLink13Description=https://datasheet.octopart.com:443/RMCF0805FT10K0-Stackpole-Electronics-datasheet-8088878.pdf?src-supplier=Future+Electronics, ComponentLink13URL=https://datasheet.octopart.com:443/RMCF0805FT10K0-Stackpole-Electronics-datasheet-8088878.pdf?src-supplier=Future+Electronics, ComponentLink14Description=https://datasheet.octopart.com:443/RMCF0805FT10K0-Stackpole-Electronics-datasheet-5313682.pdf?src-supplier=Future+Electronics, ComponentLink14URL=https://datasheet.octopart.com:443/RMCF0805FT10K0-Stackpole-Electronics-datasheet-5313682.pdf?src-supplier=Future+Electronics, ComponentLink15Description=http://sigma.octopart.com:80/15940719/materials_sheet/Stackpole-Electronics-RMCF0805FT10K0.pdf?src-supplier=Compliance+Statements, ComponentLink15URL=http://sigma.octopart.com:80/15940719/materials_sheet/Stackpole-Electronics-RMCF0805FT10K0.pdf?src-supplier=Compliance+Statements, ComponentLink16Description=http://sigma.octopart.com:80/141158211/reach_statement/Stackpole-Electronics-RMCF0805FT10K0.pdf?src-supplier=Compliance+Statements, ComponentLink16URL=http://sigma.octopart.com:80/141158211/reach_statement/Stackpole-Electronics-RMCF0805FT10K0.pdf?src-supplier=Compliance+Statements, ComponentLink17Description=http://sigma.octopart.com:80/141158212/rohs_statement/Stackpole-Electronics-RMCF0805FT10K0.pdf?src-supplier=Compliance+Statements, ComponentLink17URL=http://sigma.octopart.com:80/141158212/rohs_statement/Stackpole-Electronics-RMCF0805FT10K0.pdf?src-supplier=Compliance+Statements, Composition="Thick Film", Contact Plating=Tin, Depth=1.25mm, Design Item ID="10K 1% 1/4W 0805", Features="Automotive AEC-Q200", Height=500µm, Lead Free="Lead Free", Length=2mm, Lifecycle Status=Production, Military Standard=Not, Mounting Technology="Surface Mount", Number of Terminals=2, Number of Terminations=2, Packaging="Cut Tape (CT)", Power Dissipation=125mW, Power Rating=125mW, Pricing="5000=0.00245, 10000=0.00241, 20000=0.00238, 40000=0.00234, 80000=0.0023 (USD)", Radiation Hardening=No, REACH SVHC=Yes, RoHS=Compliant, Schedule B="8533210045, 8533210045", Source=MasterLibrary_SCH.SchLib, Stock=3420000, Width=1.25mm, Working Voltage=150V